# Altium PCB Arduino_FPGA_Shield.PcbDoc (part 1 of 2)
Units mm, origin at the board's own origin, x right, y up, seen from the top; angles counter-clockwise.
Board outline 68.58 x 53.34 mm, 4 copper layers (Top, PWR, GND, Bottom), stack 2.023 mm thick; 113 components, 155 nets, 516 pads, 223 vias.
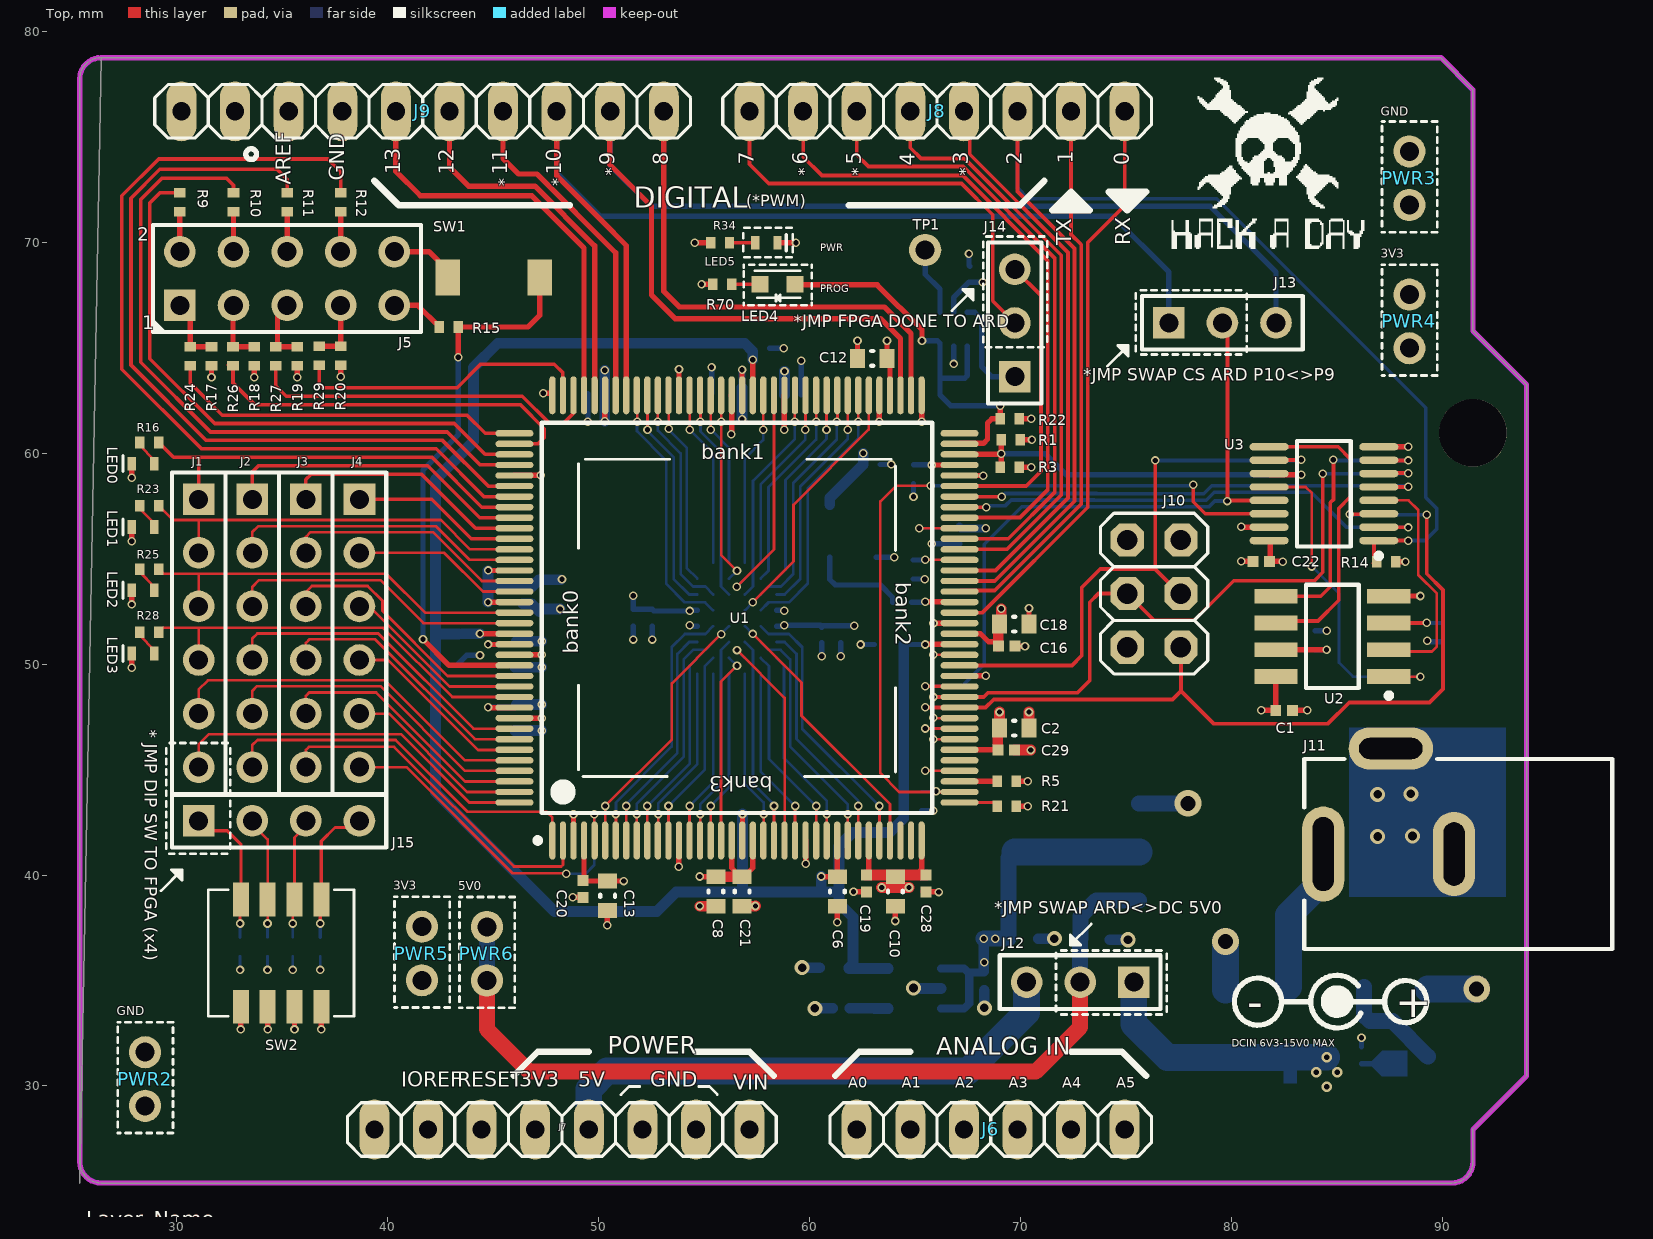
[diagram p0: Top view]
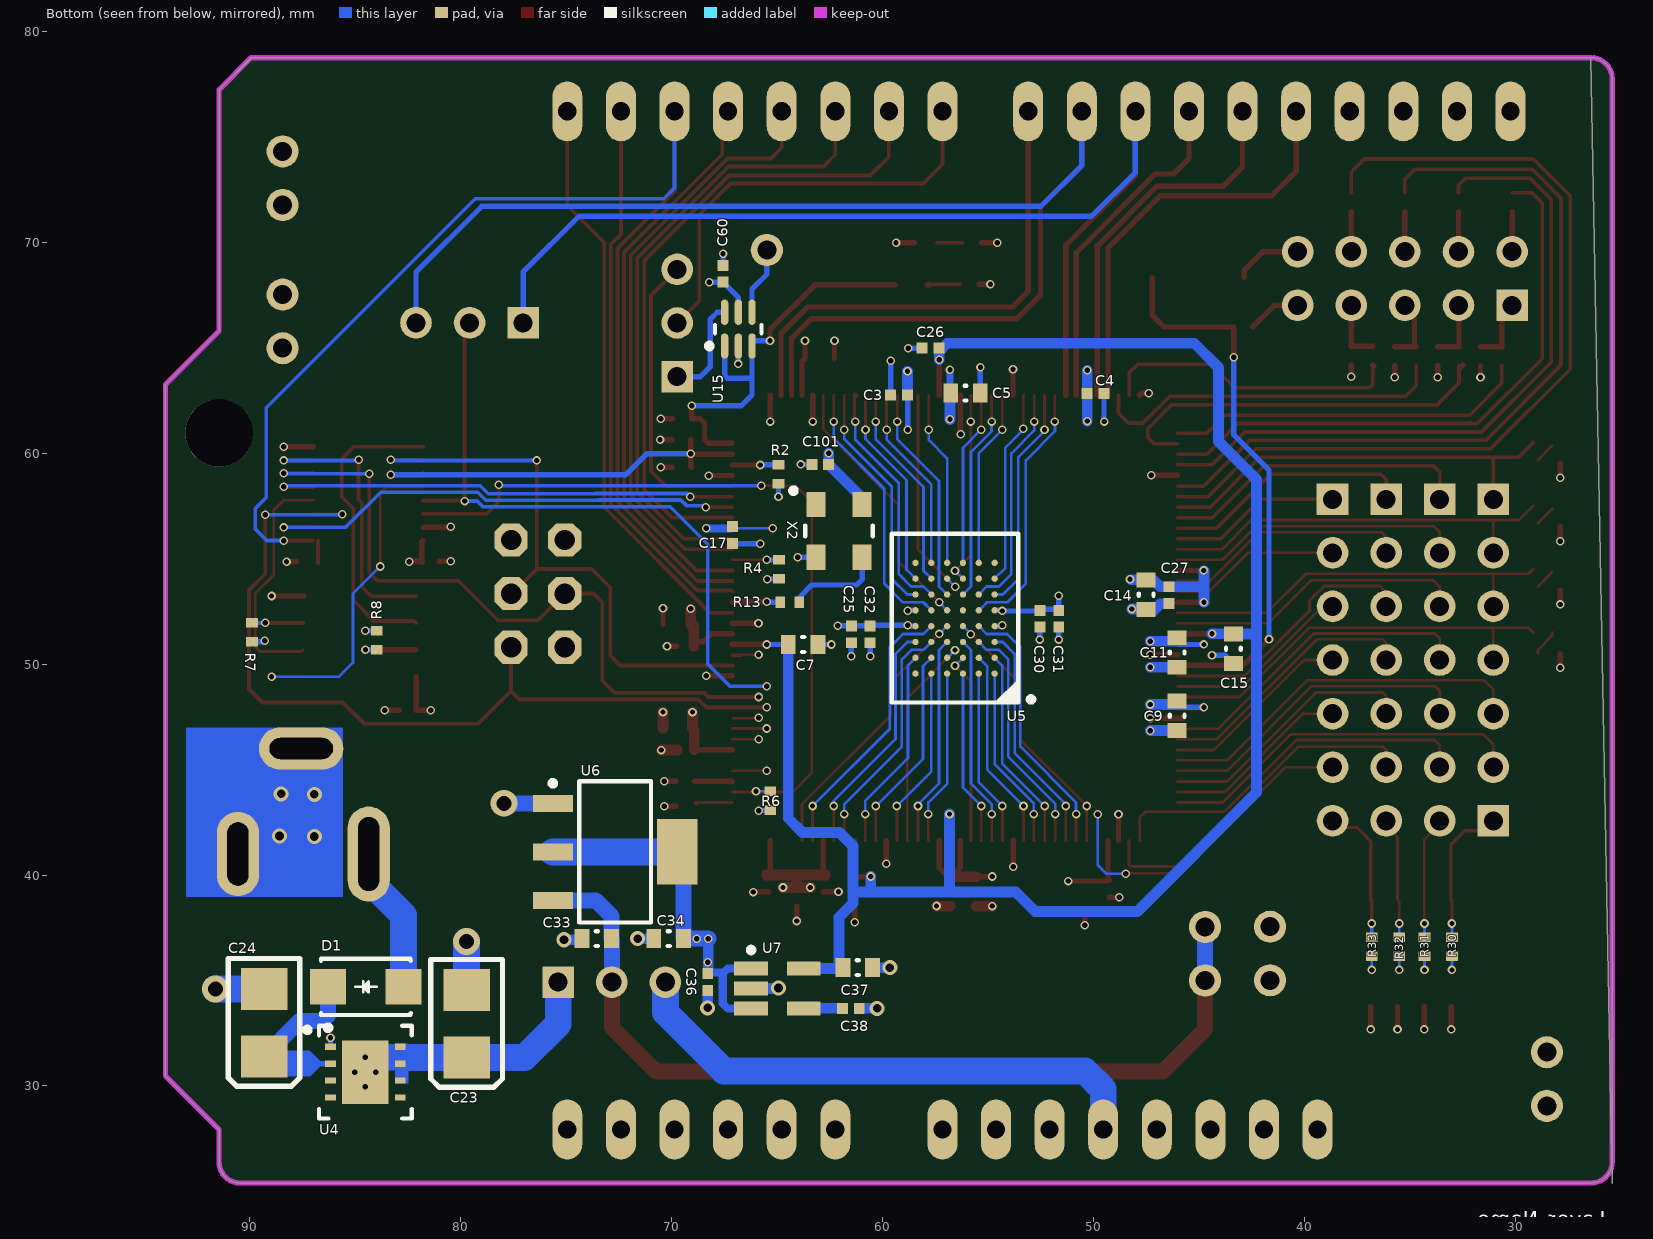
[diagram p1: Bottom view, seen from below]
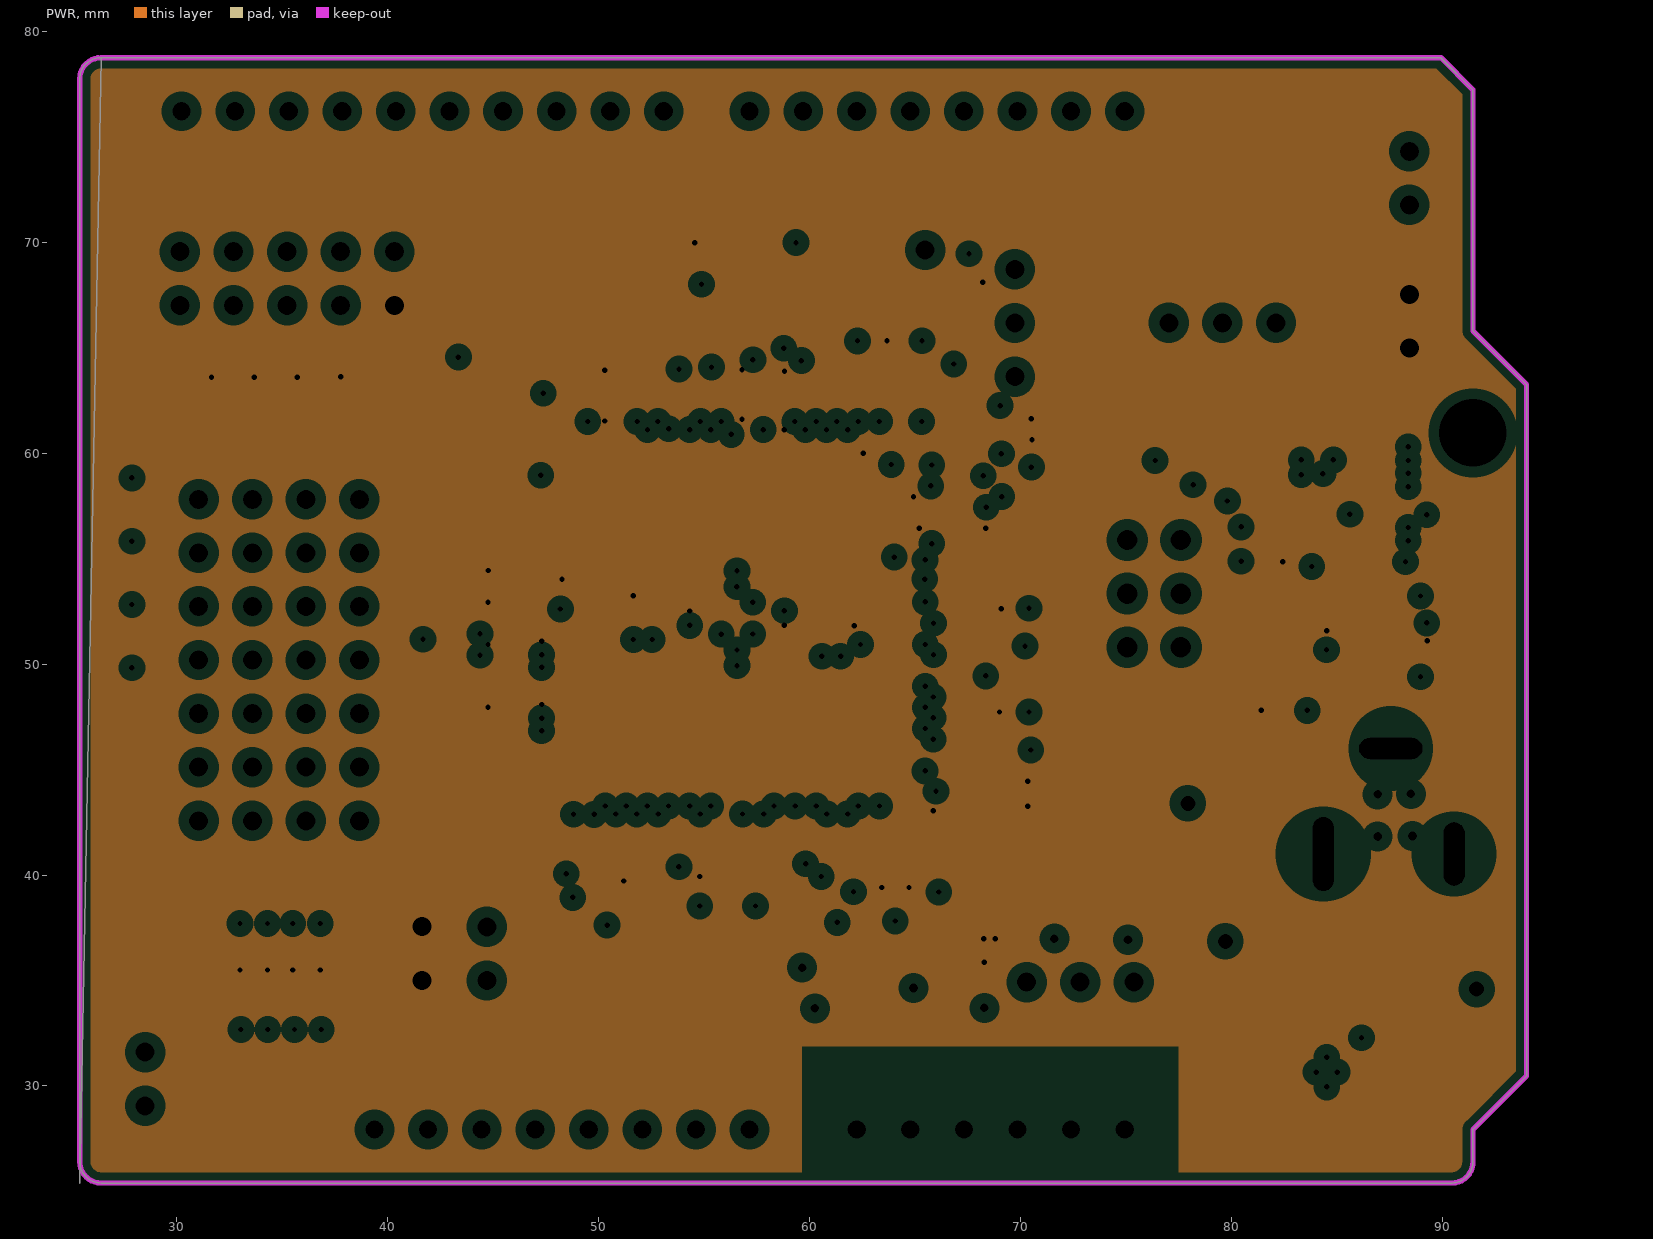
[diagram p2: PWR, clearances drawn from the general rule]
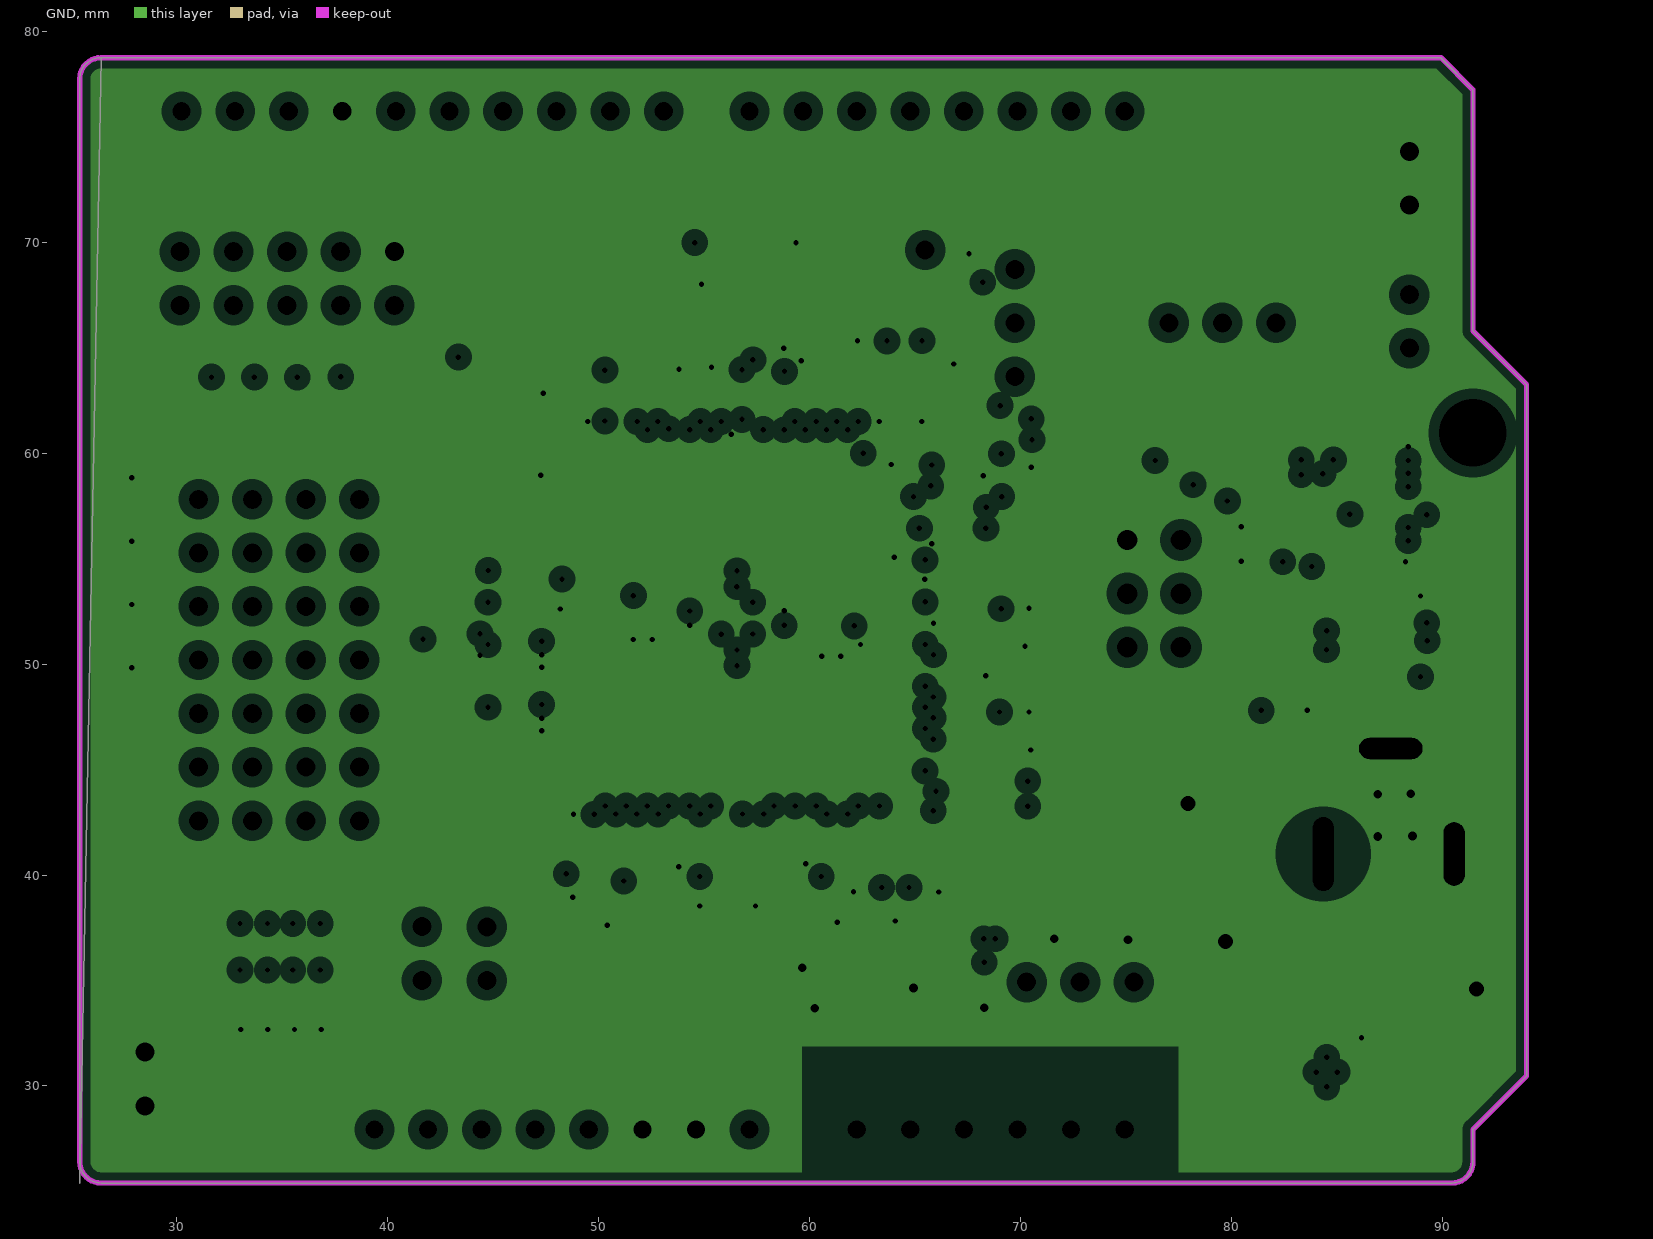
[diagram p3: GND, clearances drawn from the general rule]

## Layer stack, top to bottom
Top: signal copper 0.035
Dielectric: core 1.5, FR-4, Dk 4.8
PWR: plane copper 0.036, net 3V3
Dielectric: prepreg 0.127, Dk 4.2
GND: plane copper 0.036, net GND
Dielectric: core 0.254, Dk 4.2
Bottom: signal copper 0.035

## Board outline
26.416,78.74 89.916,78.74 91.44,77.216 91.44,65.786 93.98,63.246 93.98,30.48 91.44,27.94 91.44,26.416 cw(c90.437,26.403) 90.449,25.4 26.416,25.4 cw(c26.416,26.416) 25.4,26.416 25.4,77.749 cw(c26.403,77.737) 25.4,25.4

## Design rules (kind name [scope] priority, off if disabled: settings)
Clearance [All] p1: gap=0.137
ComponentClearance ComponentClearance_Arrays [InComponentClass('JumperArray') vs InComponentClass('JumperArray')] p1: gap=0 collisioncheckmode=3 verticalgap=0 showdistances=FALSE
ComponentClearance ComponentClearance_LEDS [InComponentClass('LEDS') vs InComponentClass('LEDS')] p2: gap=0.127 collisioncheckmode=3 verticalgap=0.127 showdistances=FALSE
ComponentClearance [All] p3: gap=0.254 collisioncheckmode=3 verticalgap=0.254 showdistances=FALSE
HoleSize [All] p1: absolutevalues=TRUE maxlimit=2540 minlimit=0.178 maxpercent=80.000 minpercent=20.000
HoleToHoleClearance [All] p1: gap=0.203 allowstackedmicrovias=TRUE
MinimumSolderMaskSliver [All] p1 off: minsoldermaskwidth=0.254
PasteMaskExpansion [All] p1: expansion=0.051
PlaneClearance [All] p1: clearance=0.508
PlaneConnect PlaneConnect_1 [IsVia And (AsMM(ViaDiameter) = 0.405)] p1: planeconnectstyle=NoConnect reliefexpansion=0.508 reliefentries=4 reliefconductorwidth=0.254 reliefairgap=0.254
PlaneConnect [All] p2: planeconnectstyle=Relief reliefexpansion=0.508 reliefentries=4 reliefconductorwidth=0.254 reliefairgap=0.254
PolygonConnect ThermalVias [IsVia] p1: connectstyle=Direct reliefconductorwidth=0.254 reliefentries=4 polygonreliefangle="90 Angle" airgapwidth=0.254
PolygonConnect [All] p2: connectstyle=Relief reliefconductorwidth=0.254 reliefentries=4 polygonreliefangle="90 Angle" airgapwidth=0.254
RoutingVias [All] p1: holewidth=0.254 width=0.406 viastyle="Through Hole" minholewidth=0.254 minwidth=0.406 maxholewidth=0.711 maxwidth=1.219
SilkToSilkClearance [All] p1 off: silktosilkclearance=0.254
SilkToSolderMaskClearance [IsPad] p1 off: minsilkscreentomaskgap=0.254 clearancetoexposedcopper=TRUE
SolderMaskExpansion [All] p1: expansion=0.025
Width POWER [InNetClass('POWER')] p1: maxlimit=2.54 minlimit=0.254 preferedwidth=0.254
Width [All] p2: maxlimit=2.54 minlimit=0.127 preferedwidth=0.127
19 further rules are at their usual default settings.

## Classes and differential pairs
component class JumperArray: J1 J2 J3 J4 J15
component class "Power - 3V3": C33 C34 U6
net class SRAM0_D[15..0]: SRAM0_D0 SRAM0_D1 SRAM0_D2 SRAM0_D3 SRAM0_D4 SRAM0_D5 SRAM0_D6 SRAM0_D7 SRAM0_D8 SRAM0_D9 SRAM0_D10 SRAM0_D11 SRAM0_D12 SRAM0_D13 SRAM0_D14 SRAM0_D15
net class SRAM0_A[17..0]: SRAM0_A0 SRAM0_A1 SRAM0_A2 SRAM0_A3 SRAM0_A4 SRAM0_A5 SRAM0_A6 SRAM0_A7 SRAM0_A8 SRAM0_A9 SRAM0_A10 SRAM0_A11 SRAM0_A12 SRAM0_A13 SRAM0_A14 SRAM0_A15 SRAM0_A16 SRAM0_A17
component class SRAM0: C25 C30 C31 C32 U5
component class "SPI MUX": C22 U3
component class FLASH_MEMORY: C1 R7 R8 U2
component class POWER: C23 C24 D1 J11 J12 U4
component class "Arduino FPGA Top-Level Interface": J1 J2 J3 J4 J5 J6 J7 J8 J9 J10 J13 J14 J15 LED0 LED1 LED2 LED3 PWR2 PWR3 PWR4 PWR5 PWR6 R16 R23 R25 R28 R30 R31 R32 R33 SW2 TP1
component class "U_FPGA - Decoupling": C2 C3 C4 C5 C6 C7 C8 C9 C10 C11 C12 C13 C14 C15 C16 C17 C18 C19 C20 C21 C26 C27 C28 C29
component class FPGA_SUBSYSTEM: R1 R2 R3 R4 R5 R6 R9 R10 R11 R12 R17 R18 R19 R20 R21 R22 R24 R26 R27 R29 U1
component class "ARDUINO FPGA DESIGN": C101 R13 R14 R15 SW1 X2
component class "Power - 1V2": C36 C37 C38 U7
component class LEDS: C60 LED4 LED5 R34 R70 U15

## Components (designator, comment, footprint, x,y, rotation, side; value= is the part's Value field where it differs from the comment)
C1 "CAP 100nF 16V 0402(1005)" CAPC0402(1005)60_L 82.492,47.804 r0 top
C2 "CAP 4.7uF 10V 0603(1608)" CAPC0603(1608)55_L 69.698,46.965 r0 top
C3 "CAP 470nF 10V 0402(1005)" CAPC0402(1005)60_L 59.207,62.763 r180 bottom
C4 "CAP 470nF 10V 0402(1005)" CAPC0402(1005)60_L 49.892,62.823 r0 bottom
C5 "CAP 4.7uF 10V 0603(1608)" CAPC0603(1608)55_L 56.058,62.84 r180 bottom
C6 "CAP 4.7uF 10V 0603(1608)" CAPC0603(1608)55_L 61.316,39.218 r270 top
C7 "CAP 4.7uF 10V 0603(1608)" CAPC0603(1608)55_L 63.754,50.927 r180 bottom
C8 "CAP 4.7uF 10V 0603(1608)" CAPC0603(1608)55_L 55.55,39.218 r270 top
C9 "CAP 4.7uF 10V 0603(1608)" CAPC0603(1608)55_L 46.025,47.549 r270 bottom
C10 "CAP 4.7uF 10V 0603(1608)" CAPC0603(1608)55_L 64.059,39.218 r270 top
C11 "CAP 4.7uF 10V 0603(1608)" CAPC0603(1608)55_L 46.025,50.546 r270 bottom
C12 "CAP 4.7uF 10V 0603(1608)" CAPC0603(1608)55_L 62.967,64.491 r180 top
C13 "CAP 4.7uF 10V 0603(1608)" CAPC0603(1608)55_L 50.419,39.014 r270 top
C14 "CAP 4.7uF 10V 0603(1608)" CAPC0603(1608)55_L 47.498,53.289 r90 bottom
C15 "CAP 4.7uF 10V 0603(1608)" CAPC0603(1608)55_L 43.358,50.724 r270 bottom
C16 "CAP 470nF 10V 0402(1005)" CAPC0402(1005)60_L 69.342,50.851 r180 top
C17 "CAP 470nF 10V 0402(1005)" CAPC0402(1005)60_L 67.107,56.109 r90 bottom
C18 "CAP 4.7uF 10V 0603(1608)" CAPC0603(1608)55_L 69.698,51.892 r180 top
C19 "CAP 470nF 10V 0402(1005)" CAPC0402(1005)60_L 62.687,39.599 r90 top
C20 "CAP 470nF 10V 0402(1005)" CAPC0402(1005)60_L 49.251,39.345 r90 top
C21 "CAP 4.7uF 10V 0603(1608)" CAPC0603(1608)55_L 56.794,39.218 r90 top
C22 "CAP 100nF 16V 0402(1005)" CAPC0402(1005)60_L 81.407,54.864 r180 top
C23 "TAJB106K020R" AVX-CAPC3528_V 79.705,32.944 r90 bottom
C24 "TAJB106K020R" AVX-CAPC3528_V 89.306,32.995 r90 bottom
C25 "CAP 100nF 16V 0402(1005)" CAPC0402(1005)60_L 61.468,51.41 r270 bottom
C26 "CAP 470nF 10V 0402(1005)" CAPC0402(1005)60_L 57.709,64.973 r0 bottom
C27 "CAP 470nF 10V 0402(1005)" CAPC0402(1005)60_L 46.406,53.264 r270 bottom
C28 "CAP 470nF 10V 0402(1005)" CAPC0402(1005)60_L 65.507,39.599 r90 top
C29 "CAP 470nF 10V 0402(1005)" CAPC0402(1005)60_L 69.317,45.923 r180 top
C30 "CAP 100nF 16V 0402(1005)" CAPC0402(1005)60_L 52.527,52.146 r270 bottom
C31 "CAP 10nF 16V 0402(1005)" CAPC0402(1005)33_L 51.638,52.146 r270 bottom
C32 "CAP 10nF 16V 0402(1005)" CAPC0402(1005)33_L 60.579,51.41 r270 bottom
C33 "CAP 4.7uF 10V 0603(1608)" CAPC0603(1608)55_L 73.533,36.982 r0 bottom
C34 "CAP 4.7uF 10V 0603(1608)" CAPC0603(1608)55_L 70.129,36.982 r0 bottom
C36 "CAP 1uF 16V 0402(1005)" CAPC0402(1005)60_L 68.275,34.925 r90 bottom
C37 "CAP 2.2uF 16V 0603(1608)" CAPC0603(1608)55_L 61.163,35.611 r0 bottom
C38 "CAP 10nF 16V 0402(1005)" CAPC0402(1005)33_L 61.493,33.68 r0 bottom
C60 "CAP 100nF 10V 0402(1005)" CAPC0402(1005)60_L 67.55,68.5 r270 bottom
C101 "CAP 100nF 16V 0402(1005)" CAPC0402(1005)60_L 62.941,59.461 r0 bottom
D1 "S1G" DO-214AC 84.48,34.696 r0 bottom
J1 "HDR1X6X1" HDR1X6 31.039,57.81 r270 top
J2 "6-POS VERTICAL HEADER" HDR1X6 33.579,57.81 r270 top
J3 "6-POS VERTICAL HEADER" HDR1X6 36.119,57.81 r270 top
J4 "6-POS VERTICAL HEADER" HDR1X6 38.659,57.81 r270 top
J5 "Header 5X2" HDR2X5 30.15,67.005 r0 top
J6 "Header 6" 1X06 68.58,27.94 r0 top
J7 "Header 8" 1X08 48.26,27.94 r0 top
J8 "Header 8" 1X08 66.04,76.2 r180 top
J9 "Header 10" 1X10@1 41.656,76.2 r180 top
J10 "Header 3X2" 2X03 76.327,53.34 r90 top
J11 "PWR CONNECTOR" KLD-0202 98.044,40.996 r180 top
J12 "3-WAY JUMPER" HDR1X3 75.362,34.925 r180 top
J13 "3-WAY JUMPER" HDR1X3 77.025,66.175 r0 top
J14 "3-WAY JUMPER" HDR1X3 69.725,63.625 r90 top
J15 "4-POS VERTICAL HEADER" HDR1X4 31.039,42.57 r0 top
LED0 "0402-LED-RED" LED_0402 28.4,59.5 r180 top
LED1 "0402-LED-RED" LED_0402 28.4,56.5 r180 top
LED2 "0402-LED-RED" LED_0402 28.4,53.5 r180 top
LED3 "0402-LED-RED" LED_0402 28.4,50.5 r180 top
LED4 "LED_GREEN_APT1608SGC" LED0603 59.3,68 r180 top
LED5 "0402-LED-RED" LED_0402 57.95,69.975 r0 top
PWR2 "Jumper" JMP1X2 28.5,31.6 r0 top
PWR3 "Jumper" JMP1X2 88.425,74.3 r0 top
PWR4 "Jumper" JMP1X2 88.425,67.51 r0 top
PWR5 "Jumper" JMP1X2 41.621,37.55 r0 top
PWR6 "Jumper" JMP1X2 44.7,37.54 r0 top
R1 "100R 1 0402" RESC0402(1005)40_L 69.52,60.63 r0 top
R2 "4K7 1 0402" RESC0402(1005)40_L 64.922,59.004 r270 bottom
R3 "100R 1 0402" RESC0402(1005)40_L 69.494,59.334 r180 top
R4 "1K 1 0402" RESC0402(1005)40_L 64.897,54.483 r90 bottom
R5 "4K7 1 0402" RESC0402(1005)40_L 69.342,44.45 r0 top
R6 "4K7 1 0402" RESC0402(1005)40_L 65.303,43.51 r270 bottom
R7 "4K7" RESC0402(1005)40_L 89.875,51.5 r270 bottom
R8 "4K7" RESC0402(1005)40_L 83.958,51.127 r90 bottom
R9 "33R 1 0402" RESC0402(1005)40_L 30.15,71.882 r90 top
R10 "33R 1 0402" RESC0402(1005)40_L 32.69,71.882 r90 top
R11 "33R 1 0402" RESC0402(1005)40_L 35.23,71.882 r90 top
R12 "33R 1 0402" RESC0402(1005)40_L 37.77,71.882 r90 top
R13 "33R 1 0402" RESC0402(1005)40_L 64.389,52.934 r180 bottom
R14 "4K7 1 0402" RESC0402(1005)40_L 87.325,54.85 r180 top
R15 "4K7 1 0402" RESC0402(1005)40_L 42.9,65.975 r180 top
R16 "270R 1 0402" RESC0402(1005)40_L 28.7,60.5 r0 top
R17 "4K7 1 0402" RESC0402(1005)40_L 31.648,64.592 r270 top
R18 "4K7 1 0402" RESC0402(1005)40_L 33.68,64.592 r270 top
R19 "4K7 1 0402" RESC0402(1005)40_L 35.712,64.585 r270 top
R20 "4K7 1 0402" RESC0402(1005)40_L 37.77,64.61 r270 top
R21 "4K7 1 0402" RESC0402(1005)40_L 69.342,43.256 r0 top
R22 "330R 1 0402" RESC0402(1005)40_L 69.487,61.62 r0 top
R23 "270R 1 0402" RESC0402(1005)40_L 28.7,57.5 r0 top
R24 "33R 1 0402" RESC0402(1005)40_L 30.632,64.592 r270 top
R25 "270R 1 0402" RESC0402(1005)40_L 28.7,54.5 r0 top
R26 "33R 1 0402" RESC0402(1005)40_L 32.664,64.592 r270 top
R27 "33R 1 0402" RESC0402(1005)40_L 34.696,64.585 r270 top
R28 "270R 1 0402" RESC0402(1005)40_L 28.7,51.5 r0 top
R29 "33R 1 0402" RESC0402(1005)40_L 36.754,64.61 r270 top
R30 "4K7 1 0402" RESC0402(1005)40_L 33,36.6 r270 bottom
R31 "4K7 1 0402" RESC0402(1005)40_L 34.3,36.6 r270 bottom
R32 "4K7 1 0402" RESC0402(1005)40_L 35.5,36.6 r270 bottom
R33 "4K7 1 0402" RESC0402(1005)40_L 36.8,36.6 r270 bottom
R34 "270R 1 0402" RESC0402(1005)40_L 55.75,69.975 r0 top
R70 "56R 1% 0402(1005)" RESC0402(1005)_L 55.85,68 r180 top
SW1 "Button-30x40-2P" BUTTON-30X40-2P 45.025,68.325 r180 top
SW2 "CHS-04TA" CHS-04A1 31.5,33.3 r0 top
TP1 "TESTPOINT_TH" TESTPOINT_TH 65.475,69.625 r0 top
U1 "XC6SLX9-2TQG144C" TQG144_N 56.555,52.187 r90 top
U2 "S25FL216K0PMFI041" SPANSION-SOIC127P600X175-8M 84.778,51.309 r180 top
U3 "SN74CBTLV3257DBQR" TI-DBQ16_N 84.375,58.075 r180 top
U4 "LM1086ILD-3.3/NOPB" LDC08A 84.506,30.658 r180 bottom
U5 "IS61WV12816DBLL-10BLI" ISSI-TF-BGA-48-6000X8000DE 56.552,52.172 r0 bottom
U6 "AP2114H-3.3TRG1" SOT230P700X180-4L 72.669,41.097 r180 bottom
U7 "CAT6219-125TDGT3" ONSC-SOT23-5_M 64.973,34.62 r180 bottom
U15 "SN74LVC2G34DCKR" TI-DCK6_L 66.825,65.875 r90 bottom
X2 "KC5032A20.0000CM0E00" HOSC-L500HW320H105-4_2 62.052,56.312 r270 bottom

## Footprints (in the part's own frame and the unit in brackets; to place one, negate y for a bottom-side part, rotate by r counter-clockwise, add the part's x,y. Pads: shape width x height; smd on the part's side, far side on the other; paste and mask are expansions set on the pad)
1X06 [mil] "1X06"
  oval 56x112 hole 34: 1(-250,0) 2(-150,0) 3(-50,0) 4(50,0) 5(150,0) 6(250,0)
  silkscreen extent -300,-50 300,50, body extent -300,-50 300,50, height 335
1X08 [mil] "1X08"
  oval 56x112 hole 34: 1(-350,0) 2(-250,0) 3(-150,0) 4(-50,0) 5(50,0) 6(150,0) 7(250,0) 8(350,0)
  silkscreen extent -400,-50 400,50, body extent -400,-50 400,50, height 335
1X10@1 [mil] "1X10@1"
  oval 56x112 hole 34: 1(-450,0) 2(-350,0) 3(-250,0) 4(-150,0) 5(-50,0) 6(50,0) 7(150,0) 8(250,0) 9(350,0) 10(450,0)
  silkscreen extent -500,-50 500,50, body extent -500,-50 500,50, height 335
2X03 [mil] "2X03"
  oct 62x62 hole 38: 1(-100,-50) 2(-100,50) 3(0,-50) 4(0,50) 5(100,-50) 6(100,50)
  silkscreen extent -150,-100 150,100, body extent -150,-100 150,100, height 335
AVX-CAPC3528_V [mm] "SMT Capacitor, 2 Leads, Body 3.5x2.8mm"
  rect 2x2.2 smd: 1(-1.6,0) 2(1.6,0)
  silkscreen extent -3,-1.7 3.05,1.7, body extent -1.79,-1.54 1.8,1.54, height 1.9
BUTTON-30X40-2P [mm]
  rect 1.15x1.7 smd: 1(-2.175,0) 2(2.175,0)
  body extent -2.12,-1.45 2.12,1.45, height 2.13
CAPC0402(1005)33_L [mm] "Chip Capacitor, Body 1.0x0.5mm, Height 0.33mm, IPC High Density"
  rect 0.52x0.52 smd: 1(-0.4,0) 2(0.4,0)
  body extent -0.55,-0.3 0.55,0.3, height 0.33
CAPC0402(1005)60_L [mm] "Chip Capacitor, Body 1.0x0.5mm, Height 0.6mm, IPC High Density"
  rect 0.52x0.52 smd: 1(-0.4,0) 2(0.4,0)
  body extent -0.55,-0.3 0.55,0.3, height 0.6
CAPC0603(1608)55_L [mm] "Chip Capacitor, Body 1.6x0.8mm, Height 0.55mm, IPC High Density"
  rect 0.7x0.9 smd: 1(-0.7,0) 2(0.7,0)
  silkscreen extent -0.05,-0.35 0.05,0.35, body extent -0.87,-0.47 0.88,0.48, height 0.55
CHS-04A1 [mm]
  rect 0.76x1.6 smd: 1(1.54,5.54) 2(1.54,0.46) 3(2.81,5.54) 4(2.81,0.46) 5(4.08,5.54) 6(4.08,0.46) 7(5.35,5.54) 8(5.35,0.46)
  silkscreen extent 0,0 6.9,6, body extent 0,-0.2 6.9,6.2, height 2.75
DO-214AC [mm] "SMA, 2-Leads, Body 4.245x2.665mm, Height 2.29mm"
  rect 1.7x1.68 smd: 1(-1.79,0) 2(1.79,0)
  silkscreen extent -2.12,-1.33 2.12,2.06, body extent -2.57,-1.33 2.57,1.33, height 2.29
HDR1X3 [mm] "Connector; Header; 3 Position"
  rect 1.5x1.5 hole 0.9: 1(0,0)
  round 1.5 hole 0.9: 2(2.54,0) 3(5.08,0)
  silkscreen extent -1.27,-1.27 6.35,1.27, body extent -1.17,-1.25 6.45,1.25, height 8.22
HDR1X4 [mm] "Connector; Header; 4 Position"
  rect 1.5x1.5 hole 0.9: 1(0,0)
  round 1.5 hole 0.9: 2(2.54,0) 3(5.08,0) 4(7.62,0)
  silkscreen extent -1.27,-1.27 8.89,1.27, body extent -1.17,-1.25 8.99,1.25, height 8.2
HDR1X6 [mm] "Connector; Header; 6 Position"
  rect 1.5x1.5 hole 0.9: 1(0,0)
  round 1.5 hole 0.9: 2(2.54,0) 3(5.08,0) 4(7.62,0) 5(10.16,0) 6(12.7,0)
  silkscreen extent -1.27,-1.27 13.97,1.27, body extent -1.17,-1.25 14.07,1.25, height 8.2
HDR2X5 [mm] "Connector; Header; 5x2 Position"
  rect 1.5x1.5 hole 0.9: 1(0,0)
  round 1.5 hole 0.9: 2(0,2.54) 3(2.54,0) 4(2.54,2.54) 5(5.08,0) 6(5.08,2.54) 7(7.62,0) 8(7.62,2.54) 9(10.16,0) 10(10.16,2.54)
  silkscreen extent -1.27,-1.27 11.43,3.81, body extent -1.27,-1.27 11.43,3.81, height 8.5
HOSC-L500HW320H105-4_2 [mm] "Quartz Crystal, Body 5.0 x 3.2 mm, Height 1.05mm"
  rect 1.2x0.9 smd: 1(-1.25,-1.1) 2(1.25,-1.1) 3(1.25,1.1) 4(-1.25,1.1)
  silkscreen extent -2.03,-2.28 0.25,1.6, body extent -2.5,-1.6 2.5,1.6, height 1
ISSI-TF-BGA-48-6000X8000DE [mm] "BGA, 48-Balls, Body 8x6mm, Pitch 0.75mm"
  round 0.3 smd: A1(-1.875,2.625) A2(-1.125,2.625) A3(-0.375,2.625) A4(0.375,2.625) A5(1.125,2.625) A6(1.875,2.625) B1(-1.875,1.875) B2(-1.125,1.875) B3(-0.375,1.875) B4(0.375,1.875) B5(1.125,1.875) B6(1.875,1.875) C1(-1.875,1.125) C2(-1.125,1.125) C3(-0.375,1.125) C4(0.375,1.125) C5(1.125,1.125) C6(1.875,1.125) D1(-1.875,0.375) D2(-1.125,0.375) D3(-0.375,0.375) D4(0.375,0.375) D5(1.125,0.375) D6(1.875,0.375) E1(-1.875,-0.375) E2(-1.125,-0.375) E3(-0.375,-0.375) E4(0.375,-0.375) E5(1.125,-0.375) E6(1.875,-0.375) F1(-1.875,-1.125) F2(-1.125,-1.125) F3(-0.375,-1.125) F4(0.375,-1.125) F5(1.125,-1.125) F6(1.875,-1.125) G1(-1.875,-1.875) G2(-1.125,-1.875) G3(-0.375,-1.875) G4(0.375,-1.875) G5(1.125,-1.875) G6(1.875,-1.875) H1(-1.875,-2.625) H2(-1.125,-2.625) H3(-0.375,-2.625) H4(0.375,-2.625) H5(1.125,-2.625) H6(1.875,-2.625)
  silkscreen extent -3.72,-4 3,4, body extent -3,-4 3,4, height 1.1
JMP1X2 [mil]
  round 60 hole 35.5: 1(0,0) 2(0,-100)
  silkscreen extent -51,-151 52,56, body extent -49,-154 49,46, height 323
KLD-0202 [mm] "DC Power Jack, 2.5mm, KLD Series, PCB Mount"
  oval 2x4.5 hole 1 slot 3.5 at 90 deg: 1(13.7,0)
  oval 2x4 hole 1 slot 3 at 90 deg: 2(7.5,0)
  oval 4x2 hole 1 slot 3 at 0 deg: 3(10.5,-5)
  silkscreen extent 0,-4.5 14.6,4.5, body extent -0.13,-4.75 13.7,4.75, height 11.02
LDC08A [mm] "PSON, 8-Leads, Body 4x4mm, Pitch 0.8mm, NSC Recommended"
  rect 0.5x0.3 smd paste-0.15 mask+0.051: 1(-1.65,1.2) 2(-1.65,0.4) 3(-1.65,-0.4) 4(-1.65,-1.2) 5(1.65,-1.2) 6(1.65,-0.4) 7(1.65,0.4) 8(1.65,1.2)
  rect 2.2x3 smd paste-1.5 mask+0.051: 9(0,0)
  silkscreen extent -2.88,-2.2 2.2,2.2, body extent -2.05,-2.05 2.05,2.05, height 0.8
LED0603 [mm]
  rect 0.8x0.8 smd: 1(0,0) 2(1.651,0)
  silkscreen extent -0.25,-0.64 1.91,0.8, body extent 0,-0.45 1.7,0.45, height 0.9
LED_0402 [mm]
  rect 0.4x0.65 smd: 1(-0.525,0) 2(0.525,0)
  silkscreen extent 0.94,-0.38 0.94,0.38, body extent -0.52,-0.25 0.48,0.25, height 0.44
ONSC-SOT23-5_M [mm] "SOT23, 5-Leads, Body 2.90x1.6mm, Pitch 0.95mm, IPC Low Density"
  rect 1.6x0.65 smd: 1(-1.25,0.95) 2(-1.25,0) 3(-1.25,-0.95) 4(1.25,-0.95) 5(1.25,0.95)
  silkscreen extent -1.38,1.7 -1.13,1.95, body extent -0.8,-1.45 0.8,1.45, height 1
RESC0402(1005)40_L [mm] "Chip Resistor, Body 1.0x0.5mm, IPC High Density"
  rect 0.45x0.55 smd: 1(-0.45,0) 2(0.45,0)
  body extent -0.52,-0.27 0.53,0.28, height 0.4
RESC0402(1005)_L [mm] "Chip Resistor, Body 1.0x0.5mm, IPC High Density"
  rect 0.45x0.55 smd: 1(-0.45,0) 2(0.45,0)
  body extent -0.52,-0.27 0.53,0.28, height 0.4
SOT230P700X180-4L [mm] "SOT223, 4-Leads, Body 6.50x7.00mm (avg), Pitch 2.30mm, IPC High Density"
  rect 1.9x0.8 smd: 1(-2.95,2.3) 2(-2.95,0) 3(-2.95,-2.3)
  rect 1.9x3.1 smd: 4(2.95,0)
  silkscreen extent -3.08,-3.35 1.7,3.37, body extent -1.85,-3.35 1.85,3.35, height 1.8
SPANSION-SOIC127P600X175-8M [mm] "SOIC, 8-Leads, Body 4.90x3.95mm, Pitch 1.27mm, IPC Low Density"
  rect 2.05x0.7 smd: 1(-2.675,1.905) 2(-2.675,0.635) 3(-2.675,-0.635) 4(-2.675,-1.905) 5(2.675,-1.905) 6(2.675,-0.635) 7(2.675,0.635) 8(2.675,1.905)
  silkscreen extent -2.8,-2.45 1.25,2.93, body extent -3,-2.45 3,2.45, height 1.72
TESTPOINT_TH [mil]
  round 60 hole 35.5: 1(0,0)
TI-DBQ16_N [mm] "SOP, 16-Leads, Body 4.9x3.9mm, Pitch 0.635mm, IPC Medium Density"
  oval 1.85x0.35 smd: 1(-2.6,2.222) 2(-2.6,1.587) 3(-2.6,0.952) 4(-2.6,0.317) 5(-2.6,-0.318) 6(-2.6,-0.953) 7(-2.6,-1.588) 8(-2.6,-2.223) 9(2.6,-2.222) 10(2.6,-1.587) 11(2.6,-0.952) 12(2.6,-0.317) 13(2.6,0.318) 14(2.6,0.953) 15(2.6,1.588) 16(2.6,2.223)
  silkscreen extent -2.73,-2.5 1.28,3.07, body extent -3.01,-2.49 3.01,2.49, height 1.75
TI-DCK6_L [mm] "SOP, 6-Leads, Body 2x1.25mm, Pitch 0.65mm, IPC High Density"
  oval 1.2x0.35 smd: 1(-0.8,0.65) 2(-0.8,0) 3(-0.8,-0.65) 4(0.8,-0.65) 5(0.8,0) 6(0.8,0.65)
  silkscreen extent -0.92,-1.1 0.2,1.5, body extent -1.05,-1 1.05,1, height 0.93
TQG144_N [mm] "Thin QFP, 144-Leads, Body 20x20mm, Pitch 0.5mm, IPC Medium Density"
  oval 1.8x0.3 smd: 1(-10.55,8.75) 2(-10.55,8.25) 3(-10.55,7.75) 4(-10.55,7.25) 5(-10.55,6.75) 6(-10.55,6.25) 7(-10.55,5.75) 8(-10.55,5.25) 9(-10.55,4.75) 10(-10.55,4.25) 11(-10.55,3.75) 12(-10.55,3.25) 13(-10.55,2.75) 14(-10.55,2.25) 15(-10.55,1.75) 16(-10.55,1.25) 17(-10.55,0.75) 18(-10.55,0.25) 19(-10.55,-0.25) 20(-10.55,-0.75) 21(-10.55,-1.25) 22(-10.55,-1.75) 23(-10.55,-2.25) 24(-10.55,-2.75) 25(-10.55,-3.25) 26(-10.55,-3.75) 27(-10.55,-4.25) 28(-10.55,-4.75) 29(-10.55,-5.25) 30(-10.55,-5.75) 31(-10.55,-6.25) 32(-10.55,-6.75) 33(-10.55,-7.25) 34(-10.55,-7.75) 35(-10.55,-8.25) 36(-10.55,-8.75) 73(10.55,-8.75) 74(10.55,-8.25) 75(10.55,-7.75) 76(10.55,-7.25) 77(10.55,-6.75) 78(10.55,-6.25) 79(10.55,-5.75) 80(10.55,-5.25) 81(10.55,-4.75) 82(10.55,-4.25) 83(10.55,-3.75) 84(10.55,-3.25) 85(10.55,-2.75) 86(10.55,-2.25) 87(10.55,-1.75) 88(10.55,-1.25) 89(10.55,-0.75) 90(10.55,-0.25) 91(10.55,0.25) 92(10.55,0.75) 93(10.55,1.25) 94(10.55,1.75) 95(10.55,2.25) 96(10.55,2.75) 97(10.55,3.25) 98(10.55,3.75) 99(10.55,4.25) 100(10.55,4.75) 101(10.55,5.25) 102(10.55,5.75) 103(10.55,6.25) 104(10.55,6.75) 105(10.55,7.25) 106(10.55,7.75) 107(10.55,8.25) 108(10.55,8.75)
  oval 0.3x1.8 smd: 37(-8.75,-10.55) 38(-8.25,-10.55) 39(-7.75,-10.55) 40(-7.25,-10.55) 41(-6.75,-10.55) 42(-6.25,-10.55) 43(-5.75,-10.55) 44(-5.25,-10.55) 45(-4.75,-10.55) 46(-4.25,-10.55) 47(-3.75,-10.55) 48(-3.25,-10.55) 49(-2.75,-10.55) 50(-2.25,-10.55) 51(-1.75,-10.55) 52(-1.25,-10.55) 53(-0.75,-10.55) 54(-0.25,-10.55) 55(0.25,-10.55) 56(0.75,-10.55) 57(1.25,-10.55) 58(1.75,-10.55) 59(2.25,-10.55) 60(2.75,-10.55) 61(3.25,-10.55) 62(3.75,-10.55) 63(4.25,-10.55) 64(4.75,-10.55) 65(5.25,-10.55) 66(5.75,-10.55) 67(6.25,-10.55) 68(6.75,-10.55) 69(7.25,-10.55) 70(7.75,-10.55) 71(8.25,-10.55) 72(8.75,-10.55) 109(8.75,10.55) 110(8.25,10.55) 111(7.75,10.55) 112(7.25,10.55) 113(6.75,10.55) 114(6.25,10.55) 115(5.75,10.55) 116(5.25,10.55) 117(4.75,10.55) 118(4.25,10.55) 119(3.75,10.55) 120(3.25,10.55) 121(2.75,10.55) 122(2.25,10.55) 123(1.75,10.55) 124(1.25,10.55) 125(0.75,10.55) 126(0.25,10.55) 127(-0.25,10.55) 128(-0.75,10.55) 129(-1.25,10.55) 130(-1.75,10.55) 131(-2.25,10.55) 132(-2.75,10.55) 133(-3.25,10.55) 134(-3.75,10.55) 135(-4.25,10.55) 136(-4.75,10.55) 137(-5.25,10.55) 138(-5.75,10.55) 139(-6.25,10.55) 140(-6.75,10.55) 141(-7.25,10.55) 142(-7.75,10.55) 143(-8.25,10.55) 144(-8.75,10.55)
  silkscreen extent -10.67,-9.25 9.25,9.57, body extent -11,-11 11,11, height 1.73

## Part data
C1 C22 C25 C30 C101: library part "CAP 100nF 16V ±10% 0402 (1005 Metric) Thickness 0.6mm SMD"
C2 C5 C6 C7 C8 C9 C10 C11 C12 C13 C14 C15 C18 C21 C33 C34: library part "CAP 4.7uF 10V ±10% 0603 (1608 Metric) Thickness 0.55mm SMD"
C3 C4 C16 C17 C19 C20 C26 C27 C28 C29: library part "CAP 470nF 10V ±10% 0402 (1005 Metric) Thickness 0.6mm SMD"
C23 C24: library part CMP-0279-00001-1, "Capacitor, Tantalum, 10uF 10% 20V MCCT-B (3528)"
C31 C32 C38: library part CMP-1034-01875-1, "CAP 10nF 16V ±10% 0402 (1005 Metric) Thickness 0.33mm SMD"
C36: library part CMP-1034-02119-1, "CAP 1uF 16V ±10% 0402 (1005 Metric) Thickness 0.6mm SMD"
C37: library part CMP-1035-02762-1, "CAP 2.2uF 16V ±10% 0603 (1608 Metric) Thickness 0.55mm SMD"
C60: library part CMP-1034-02064-1, "CAP 100nF 10V ±5% 0402 (1005 Metric) Thickness 0.6mm SMD"
D1: "Fairchild S1G General Purpose Rectifier"
J2 J3 J4: library part 6-POS-HDR
J5: "Header, 5-Pin, Dual row"
J6: "Header, 6-Pin"
J7 J8: "Header, 8-Pin"
J9: "Header, 10-Pin"
J10: "Header, 3-Pin, Dual row"
J11: library part POWER-CONNECTOR-3, "Connector, 3 Conductor Power Jack"
J12 J13 J14: "3-Way Jumper - Center Output"
J15: library part 4-POS-HDR
LED0 LED1 LED2 LED3 LED5: library part CMP-0201-0013, "0402 LED,RED"
LED4: "SMD 0603 LED, GREEN"
PWR2 PWR3 PWR4 PWR5 PWR6: library part JMP1X2, "Standard 2 Pin Jumper, 100mil spacing"
R1 R3: library part "0402 (1005 Metric) 1/16 W 100R 1 Thick Film Chip Resistor"
R2 R5 R6 R7 R8 R14 R15 R17 R18 R19 R20 R21 R30 R31 R32 R33: library part "0402 (1005 Metric) 1/16 W 4K7 1 Thick Film Chip Resistor"
R4: library part "0402 (1005 Metric) 1/16 W 1K 1 Thick Film Chip Resistor"
R9 R10 R11 R12 R13 R24 R26 R27 R29: library part "0402 (1005 Metric) 1/16 W 33R 1 Thick Film Chip Resistor"
R16 R23 R25 R28 R34: library part CMP-0503-0059, "0402 (1005 Metric) 1/16 W 270R 1 Thick Film Chip Resistor"
R22: library part "0402 (1005 Metric) 1/16 W 330R 1 Thick Film Chip Resistor"
R70: library part CMP-1011-00369-1, "56R 0.063W 1% 0402 (1005 Metric)  SMD"
SW1: library part CMP-0800-0004
SW2: "SWITCH DIP 4-POS SLIDE SMD 6V"
U1: library part CMP-0067-00454-1, "Spartan-6 LX 1.2V FPGA, 102 User I/Os, 144-Pin TQFP (0.5mm Pitch), Speed Grade 2, Commercial Grade, Pb-Free"
U2: "16-Mbit 3.0V Serial Flash Memory with Uniform 4 kB Sectors"
U3: library part CMP-0267-00001-1, "Low-Voltage 4-Bit 1-Of-2 FET Multiplexer/Demultiplexer, 16-pin SOP (DBQ16)"
U4: library part CMP-0062-01489-2, "1.5A Low Dropout Positive Regulators, 8-pin LLP, Pb-Free"
U5: library part CMP-0513-00111-1, "2 M High Speed Asynchronous CMOS SRAM, 128 K x 16, -40 to 85 degC, 48-Pin BGA (TF-BGA-48), Pb-Free"
U6: "AP2114, 1A Low Dropout Positive Fixed 3V3 Regulator"
U7: "Fixed Low Drop Positive Voltage Regulator, 1.2V 5-Pin TSOT-23, Tape and Reel"
U15: "IC BUFFER DUAL NON-INV SC706"
X2: library part "OSCILLATOR 20.0000MHZ SMD"

## Free pads (board coordinates)
  round 3.2 hole 3.2: 1(91.44,60.96)

## Via types
v1: diameter 0.406, hole 0.254, Top to Bottom, tented both sides, 141 vias
v2: diameter 0.406, hole 0.254, Top to Bottom, 57 vias
v3: diameter 0.711, hole 0.406, Top to Bottom, 10 vias
v4: diameter 0.405, hole 0.254, Top to Bottom, tented both sides, 8 vias
v5: diameter 0.5, hole 0.254, Top to Bottom, 4 vias
v6: diameter 1.27, hole 0.711, Top to Bottom, 3 vias

## Nets (pads, with @x,y where several pads share a name; then routed paths per layer and width w, separated by ;. In a path a pad name is that pad's centre, name@x,y a point inside that pad or via, vN(x,y) a via of type N, cw(c..) or ccw(c..) an arc to the next point about the centre after c; other vN are vias at no path point)
1V2: C6.1 C7.1 C15.1 C26.1 C37.2 U1.19 U1.28 U1.52 U1.89 U1.128 U7.5 | length 92.8
  Top w0.254: v1(44.371,51.434) U1.128@46.003,51.434 ; U1.19@56.816,41.647 v1(56.816,42.89) ; U1.89@57.295,62.747 57.308,62.747 v1@57.308,64.371 ; v1(60.554,39.929) 60.565,39.918 C6.1@61.316,39.918 61.316,41.626 U1.28@61.305,41.637 ; v1(65.481,50.927) 65.491,50.937 U1.52@67.105,50.937
  Bottom w0.254: C7.1@64.454,50.927 v1(65.481,50.927)
  Bottom w0.508: 42.316,51.424 C15.1@43.358,51.424 ; C15.1@43.525,51.434 v1(44.371,51.434) ; v1(56.816,42.89) 56.816,39.192 ; v1(57.308,64.421) 57.308,64.815 56.921,65.202 45.212,65.202 44.069,64.059 44.069,60.554 42.266,58.75 42.266,43.918 47.909,38.275 52.753,38.275 53.67,39.192 56.816,39.192 ; v1(60.554,39.929) 60.555,39.192 ; C37.2@61.863,35.57 U7.5@63.723,35.57 ; C37.2@61.863,35.611 62.052,35.8 62.052,37.998 61.392,38.659 61.392,39.192 ; C7.1@64.454,50.927 64.454,42.686 63.779,42.012 62.027,42.012 61.392,41.377 61.392,39.192 ; 56.816,39.192 60.555,39.192 ; 60.555,39.192 61.392,39.192
3V3: C1.1 C2.1 C3.2 C4.2 C5.1 C8.1 C9.1 C10.1 C11.1 C12.1 C13.1 C14.2 C16.2 C17.2 C18.2 C19.2 C20.2 C21.2 C22.1 C25.1 C27.1 C28.2 C29.2 C30.1 C31.1 C32.1 C34.1 C36.2 C60.2 C101.1 J5.9 PWR4.1 PWR4.2 PWR5.1 PWR5.2 R1.2 R2.2 R5.2 R6.2 R7.2 R8.2 R15.2 R17.2 R18.2 R19.2 R20.2 R21.2 R22.2 R30.2 R31.2 R32.2 R33.2 R34.1 U1.4 U1.18 U1.20 U1.31 U1.36 U1.42 U1.53 U1.63 U1.76 U1.86 U1.90 U1.103 U1.122 U1.125 U1.129 U1.135 U2.8 U3.16 U5.D6 U5.E1 U6.2 U6.4 U7.1 U7.3 U15.5 X2.4 | length 107.3
  Top w0.127: U1.90@56.795,62.726 U1.90@56.797,62.729 ; v4(65.202,56.439) 65.204,56.437 U1.63@67.105,56.437 ; U1.63@67.105,56.453 U1.63@67.111,56.453
  Top w0.254: v2(31.648,63.602) R17.2@31.648,64.142 ; v2(33.68,63.602) R18.2@33.68,64.142 ; v2(35.712,63.594) R19.2@35.712,64.135 ; v2(37.77,63.62) R20.2@37.77,64.16 ; J5.9@40.31,67.005 41.42,67.005 R15.2@42.45,65.975 ; v4(44.755,47.955) 44.773,47.937 U1.135@46.005,47.937 ; v4(44.754,50.929) U1.129@45.997,50.929 ; v4(44.754,52.929) U1.125@45.997,52.929 ; v4(44.762,54.437) U1.122@46.005,54.437 ; C20.2@49.251,39.745 49.305,39.799 U1.4@49.305,41.637 ; C20.2@49.281,39.714 C13.1@50.419,39.714 v1(51.192,39.714) ; v4(50.292,61.519) 50.292,62.723 U1.103@50.305,62.737 ; v2(54.55,69.975) R34.1@55.3,69.975 ; v1(54.788,39.929) 54.799,39.918 C8.1@55.55,39.918 ; U1.18@56.305,41.637 56.305,40.342 56.642,40.005 56.973,40.005 57.303,40.335 U1.20@57.303,41.634 ; U1.90@56.794,62.726 v4(56.794,63.957) ; v4(58.803,61.102) U1.86@58.803,62.734 ; C19.2@62.805,40.16 U1.31@62.805,41.637 ; v1(63.667,65.318) C12.1@63.667,64.491 63.805,64.352 U1.76@63.805,62.737 ; 65.056,40.005 65.305,40.255 U1.36@65.305,41.637 ; U1.42@67.105,45.937 C29.2@68.917,45.937 ; U1.53@67.105,51.437 68.096,51.437 68.475,51.057 68.736,51.057 C16.2@68.936,50.857 ; C29.2@68.903,45.937 C29.2@68.917,45.923 ; R21.2@69.792,43.256 v1(70.333,43.256) ; R5.2@69.792,44.45 v1(70.333,44.45) ; R22.2@69.937,61.62 v1(70.503,61.62) ; R1.2@69.97,60.63 v1(70.536,60.63) ; v2(81.4,47.804) C1.1@82.092,47.804 82.092,49.393 U2.8@82.103,49.404 ; U3.16@81.775,55.852 81.832,55.796 C22.1@81.832,54.814 ; C22.1@81.807,54.864 82.411,54.864 v2(82.425,54.85)
  Top w0.508: C8.1@55.55,39.918 C21.2@56.794,39.918 ; C19.2@62.687,39.999 C10.1@63.978,39.999 ; v1(63.41,39.41) 64.059,39.41 ; v1(64.708,39.41) 64.059,39.41 ; C28.2@65.507,39.999 C10.1@63.978,39.999 ; C29.2@68.917,45.937 68.917,46.884 C2.1@68.998,46.965 v1(68.998,47.724) ; C16.2@68.936,50.857 68.936,51.83 69.075,51.875 v1(69.075,52.623) ; C10.1@63.978,39.999 C10.1@64.059,39.918 64.059,39.41
  Bottom w0.127: v2(33,35.5) R30.2@33,36.15 ; v2(34.3,35.5) R31.2@34.3,36.15 ; v2(35.5,35.5) R32.2@35.5,36.15 ; v2(36.8,35.5) R33.2@36.8,36.15 ; v4(65.202,56.439) 67.037,56.439 C17.2@67.107,56.509
  Bottom w0.254: v4(44.755,47.955) 45.98,47.955 C9.1@46.107,48.082 ; v4(44.754,50.929) 45.957,50.929 C11.1@46.107,51.079 ; v1(51.643,53.243) 51.643,52.602 52.532,52.602 52.617,52.517 v1(54.32,52.517) ; v1@54.325,52.547 U5.E1@54.677,52.547 ; U5.D6@58.427,51.797 v1@58.782,51.797 ; v1(58.791,51.831) 60.494,51.831 C32.1@60.579,51.746 ; v4@58.794,61.11 C3.2@58.794,62.75 ; C32.1@60.579,51.81 C25.1@61.468,51.81 v1(62.109,51.81) ; v1@64.897,57.963 64.922,57.988 R2.2@64.922,58.554 ; R6.2@65.303,43.06 65.869,43.06 v1(65.862,43.053) ; U15.5@66.825,66.675 66.825,67.375 C60.2@67.55,68.1 v2(68.2,68.1) ; R8.2@83.958,51.577 v2(84.502,51.577) ; v2(89.275,51.1) 89.325,51.05 R7.2@89.875,51.05
  Bottom w0.33: C5.1@56.794,63.094 v4(56.794,63.957) ; v4@58.794,61.11 v4(58.803,61.102) ; C3.2@58.794,62.75 C3.2@58.807,62.763
  Bottom w0.381: U7.3@66.223,33.67 67.325,33.67 67.564,33.909 67.564,35.331 67.325,35.57 U7.1@66.223,35.57 ; C17.2@67.107,56.509 67.183,56.432 v1@68.351,56.432 ; 67.513,35.382 C36.2@68.231,35.382
  Bottom w0.508: v4(44.754,52.929) 44.754,53.696 ; v4@44.754,54.429 44.754,53.696 ; C9.1@46.107,48.082 v1(47.295,48.082) ; C11.1@46.107,51.079 v1(47.295,51.079) ; v1@48.195,53.989 C14.2@47.498,53.989 47.168,53.989 46.842,53.664 C27.1@46.406,53.664 44.786,53.664 44.754,53.696 ; v4(50.292,61.519) C4.2@50.292,62.823 v1(50.292,63.932) ; v1(56.794,61.595) C5.1@56.794,63.094 ; C3.2@58.807,62.763 v1(58.807,63.872) ; X2.4@60.952,57.562 60.952,57.872 C101.1@62.541,59.461 v1(62.541,59.988) ; C36.2@68.25,35.439 v2(68.25,36.982)
  Bottom w0.762: v2(68.25,36.982) C34.1@69.429,36.982 69.429,40.807 U6.4@69.719,41.097
  Bottom w1.27: U6.4@69.719,41.097 U6.2@75.619,41.097
  other v1: 48.26,54.026 68.351,56.439 64.922,57.937
  other v2: 68.275,35.87 68.794,36.982
5V0: C33.1 J12.2 PWR6.1 PWR6.2 U6.3 | length 43.2
  Top w0.762: PWR6.2@44.7,35 44.7,32.7 46.717,30.683 70.714,30.683 72.822,32.791 J12.2@72.822,34.925
  Bottom w0.762: PWR6.2@44.7,35 PWR6.1@44.7,37.54 PWR6.1@44.817,37.423 ; J12.2@72.822,34.925 72.822,36.971 C33.1@72.833,36.982 72.833,38.035 73.595,38.797 U6.3@75.619,38.797
5V0_ARD: J7.5 J12.3 | length 25.6
  Bottom w1.27: J7.5@49.53,27.94 49.53,29.845 50.394,30.709 67.513,30.709 70.282,33.477 J12.3@70.282,34.925
5V0_REG: C23.1 J12.1 U4.6 U4.7 U4.8 U4.9 | length 11.8
  Bottom w1.27: J12.1@75.362,34.925 75.362,32.944 76.962,31.344 C23.1@79.705,31.344 82.448,31.344 ; 82.462,31.358 v5(84.506,31.358)
  other v5: 84.506,29.958 84.006,30.658 85.006,30.658
#HARD_TCK: R24.2 U1.109 | length 17.2
  Top w0.17: R24.2@30.632,64.142 30.632,63.322 32.155,61.8 43.758,61.8 44.622,60.937 U1.109@46.005,60.937
#HARD_TDI: R26.2 U1.110 | length 18.6
  Top w0.17: R26.2@32.664,64.142 32.664,63.322 33.687,62.3 46.275,62.3 47.422,61.153 47.422,60.731 47.127,60.437 U1.110@46.005,60.437
  Top w0.254: R26.2@32.487,64.172 R26.2@32.614,64.045
#HARD_TDO: R27.2 U1.106 | length 16.8
  Top w0.17: R27.2@34.696,64.135 34.696,63.195 35.192,62.7 46.375,62.7 47.65,61.425 48.344,61.425 48.805,61.886 U1.106@48.805,62.737
#HARD_TMS: R29.2 U1.107 | length 14.3
  Top w0.17: R29.2@36.754,64.16 36.754,63.246 36.9,63.1 43.288,63.1 44.399,64.211 47.899,64.211 48.305,63.805 U1.107@48.305,62.737
  Top w0.254: R29.2@36.703,64.11 R29.2@36.754,64.16
#SOFT_TCK: R10.2 U1.112 | length 32.8
  Top w0.17: R10.2@32.69,72.332 32.69,72.695 32.36,73.025 29.3,73.025 28.296,72.021 28.296,64.304 31.6,61 42.825,61 44.388,59.437 U1.112@46.005,59.437
#SOFT_TDI: R11.2 U1.114 | length 37.3
  Top w0.17: R11.2@35.23,72.332 35.23,72.974 34.754,73.45 29.2,73.45 27.83,72.08 27.83,64.17 31.4,60.6 42.6,60.6 44.763,58.437 U1.114@46.005,58.437
#SOFT_TDO: R12.2 U1.115 | length 41.7
  Top w0.17: R12.2@37.77,72.332 37.77,73.33 37.16,73.939 29.139,73.939 27.4,72.2 27.4,63.975 31.175,60.2 42.3,60.2 44.563,57.937 U1.115@46.005,57.937
#SOFT_TMS: R9.2 U1.111 | length 28.2
  Top w0.17: R9.2@30.15,72.332 29.207,72.332 28.727,71.852 28.727,64.473 31.8,61.4 43.15,61.4 44.613,59.937 U1.111@46.005,59.937
ARD_A0: J6.1
ARD_A1: J6.2
ARD_A2: J6.3
ARD_A3: J6.4
ARD_A4: J6.5
ARD_A5: J6.6
ARD_AREF: J9.8
ARD_D0(RX): J8.1 U1.55 | length 27.6
  Top w0.178: U1.55@67.105,52.437 68.187,52.437 73.185,57.435 73.185,69.985 74.93,71.73 J8.1@74.93,76.2
ARD_D1(TX): J8.2 U1.57 | length 26.3
  Top w0.178: U1.57@67.105,53.437 67.159,53.49 68.775,53.49 72.87,57.585 72.87,69.88 72.39,70.36 J8.2@72.39,76.2
ARD_D3: J8.4 U1.59 | length 26.9
  Top w0.178: U1.59@67.105,54.437 68.812,54.437 72.241,57.866 72.241,69.509 67.586,74.164 67.586,75.924 J8.4@67.31,76.2
ARD_D4: J8.5 U1.61 | length 28.3
  Top w0.178: J8.5@64.77,76.2 64.77,74.473 65.278,73.965 67.34,73.965 71.926,69.379 71.926,58.006 69.357,55.437 U1.61@67.105,55.437
ARD_D5: J8.6 U1.62 | length 30
  Top w0.178: J8.6@62.23,76.2 62.23,74.143 62.789,73.584 67.276,73.584 71.611,69.248 71.611,58.136 69.412,55.937 U1.62@67.105,55.937
ARD_D6: J8.7 U1.64 | length 31.4
  Top w0.178: J8.7@59.69,76.2 59.69,74.041 60.579,73.152 67.262,73.152 71.28,69.135 71.28,58.255 69.972,56.947 67.116,56.947 U1.64@67.105,56.937
ARD_D7: J8.8 J14.2 | length 20.6
  Top w0.178: J8.8@57.15,76.2 57.15,73.685 58.06,72.775 67.194,72.775 68.675,71.294 68.675,67.215 J14.2@69.725,66.165
ARD_D8: J9.1 U1.74 | length 24
  Top w0.254: J9.1@53.086,76.2 53.086,67.664 53.825,66.925 63.55,66.925 64.805,65.67 U1.74@64.805,62.737
ARD_D11: J9.4 U1.102 | length 16.2
  Top w0.254: J9.4@45.466,76.2 45.466,73.965 46.203,73.228 47.072,73.228 50.805,69.495 U1.102@50.805,62.737
ARD_D12: J9.5 U1.104 | length 18.2
  Top w0.254: J9.5@42.926,76.2 42.926,73.558 43.834,72.65 46.975,72.65 49.805,69.82 U1.104@49.805,62.737
ARD_D13: J9.6 U1.105 | length 20.3
  Top w0.254: J9.6@40.386,76.2 40.386,73.355 41.541,72.2 46.825,72.2 49.305,69.72 U1.105@49.305,62.737
ARD_IOREF: J7.2
ARD_RESET: J7.3
CCLK: R1.1 R3.2 U1.70 U3.11 | length 19.5
  Top w0.254: U1.70@67.105,59.937 69.055,59.937 v1(69.088,59.969) ; R3.2@69.044,59.334 69.088,59.378 v1(69.088,59.969) ; R1.1@69.07,60.63 69.088,60.612 v1(69.088,59.969) ; U3.11@81.775,59.027 81.827,58.975 v2(83.3,58.975)
  Bottom w0.254: v1(69.088,59.969) 71.156,59.969 72.15,58.975 v2(83.3,58.975)
CS_ARD_ALT_N: J9.2 J13.3 U1.75 | length 63.5
  Top w0.254: J9.2@50.546,76.2 50.525,76.179 50.525,73.675 52.5,71.7 52.5,67.5 53.625,66.375 63.355,66.375 64.305,65.425 U1.75@64.305,62.737
  Bottom w0.254: J9.2@50.546,76.2 50.546,73.635 52.481,71.7 78.98,71.7 82.105,68.575 J13.3@82.105,66.175
CS_ARD_N: J13.2 U1.48 U3.13 | length 33.5
  Top w0.178: v1(65.481,48.945) U1.48@67.113,48.945 ; J13.2@79.565,66.175 79.804,65.936 79.804,57.729 v2(79.8,57.725) 79.832,57.757 U3.13@81.775,57.757
  Bottom w0.178: v1(65.481,48.945) 67.22,48.945 68.275,50 68.275,55.675 70.057,57.457 78.931,57.457 79.199,57.725 v2(79.8,57.725)
CS_ARD_STD_N: J9.3 J13.1 U1.101 | length 51.1
  Top w0.254: J9.3@48.006,76.2 48.006,73.152 50.155,71.003 50.155,70.992 51.305,69.842 U1.101@51.305,62.737
  Bottom w0.254: J9.3@48.006,76.2 48.006,73.304 50.085,71.225 74.375,71.225 77.025,68.575 J13.1@77.025,66.175
CS_FL_N: U2.1 U3.12 | length 16.4
  Top w0.127: U3.12@81.775,58.392 83.508,58.392 83.8,58.1 v2(83.8,54.625) ; U2.1@87.453,49.404 88.946,49.404 v2(88.95,49.4)
  Bottom w0.127: v2(83.8,54.625) 85.088,53.338 85.088,50.063 85.75,49.4 v2(88.95,49.4)
CSO_B_FPGA: R6.1 U1.38 U3.14 | length 37.5
  Top w0.127: v1(65.735,58.445) 64.084,58.445 63.348,57.709 63.348,44.831 64.242,43.937 U1.38@67.105,43.937
  Top w0.17: v2(78.175,58.5) 78.175,57.7 78.753,57.122 U3.14@81.775,57.122
  Bottom w0.127: R6.1@65.303,43.96 65.311,43.967 v1(65.989,43.967)
  Bottom w0.17: v1(65.735,58.445) v2@78.175,58.445
DONE: LED4.1 R22.1 U1.71 U15.1 U15.3 | length 20
  Top w0.254: LED4.1@59.4,67.975 63.2,67.975 65.325,65.85 v1(65.325,65.325) ; U1.71@67.128,60.459 68.232,60.459 68.428,60.655 68.428,61.417 68.631,61.62 R22.1@69.037,61.62 69.037,62.238 v1(69.025,62.25)
  Bottom w0.254: v1(65.325,65.325) 66.05,65.325 66.175,65.2 U15.3@66.175,65.075 66.175,63.55 ; U15.1@67.475,65.075 67.475,63.675 67.35,63.55 66.175,63.55 ; v1(69.025,62.25) 66.675,62.25 66.175,62.75 66.175,63.55
DONE#_ARD_D7: J14.3 U1.67 | length 14.2
  Top w0.178: U1.67@67.105,58.437 70.262,58.437 70.965,59.14 70.965,67.465 J14.3@69.725,68.705
DONE_ARD: J14.1 U15.6 | length 4.8
  Bottom w0.254: U15.6@67.475,66.675 67.825,66.675 68.15,66.35 68.15,64.1 68.625,63.625 J14.1@69.725,63.625
DONE_TP: TP1.1 U15.4 | length 3.2
  Bottom w0.254: TP1.1@65.475,69.625 65.475,68.475 66.175,67.775 U15.4@66.175,66.675
EXT_PWR: C24.1 D1.2 U4.2 | length 5.8
  Bottom w0.254: U4.2@86.156,31.058 86.76,31.058
  Bottom w0.762: D1.2@86.27,34.696 86.27,33.364 86.563,33.071 87.63,33.071 C24.1@89.306,31.395
EXT_PWR#: D1.1 J11.1 | length 5.7
  Bottom w1.27: D1.1@82.69,34.696 82.69,38.092 J11.1@84.344,39.746
FPGA_CLK: R13.1 U1.56 | length 2.3
  Top w0.254: v1(65.481,52.945) 67.097,52.945 U1.56@67.105,52.937
  Bottom w0.254: R13.1@64.839,52.934 65.47,52.934 v1(65.481,52.945)